# Altium PCB Faceball_2000_buffered_adapter_v1.0.PcbDoc
Units mm, origin at the board's own origin, x right, y up, seen from the top; angles counter-clockwise.
Board outline 80 x 40 mm, 2 copper layers (Top Layer, Bottom Layer), stack 1.58 mm thick; 17 components, 18 nets, 76 pads, 12 vias.
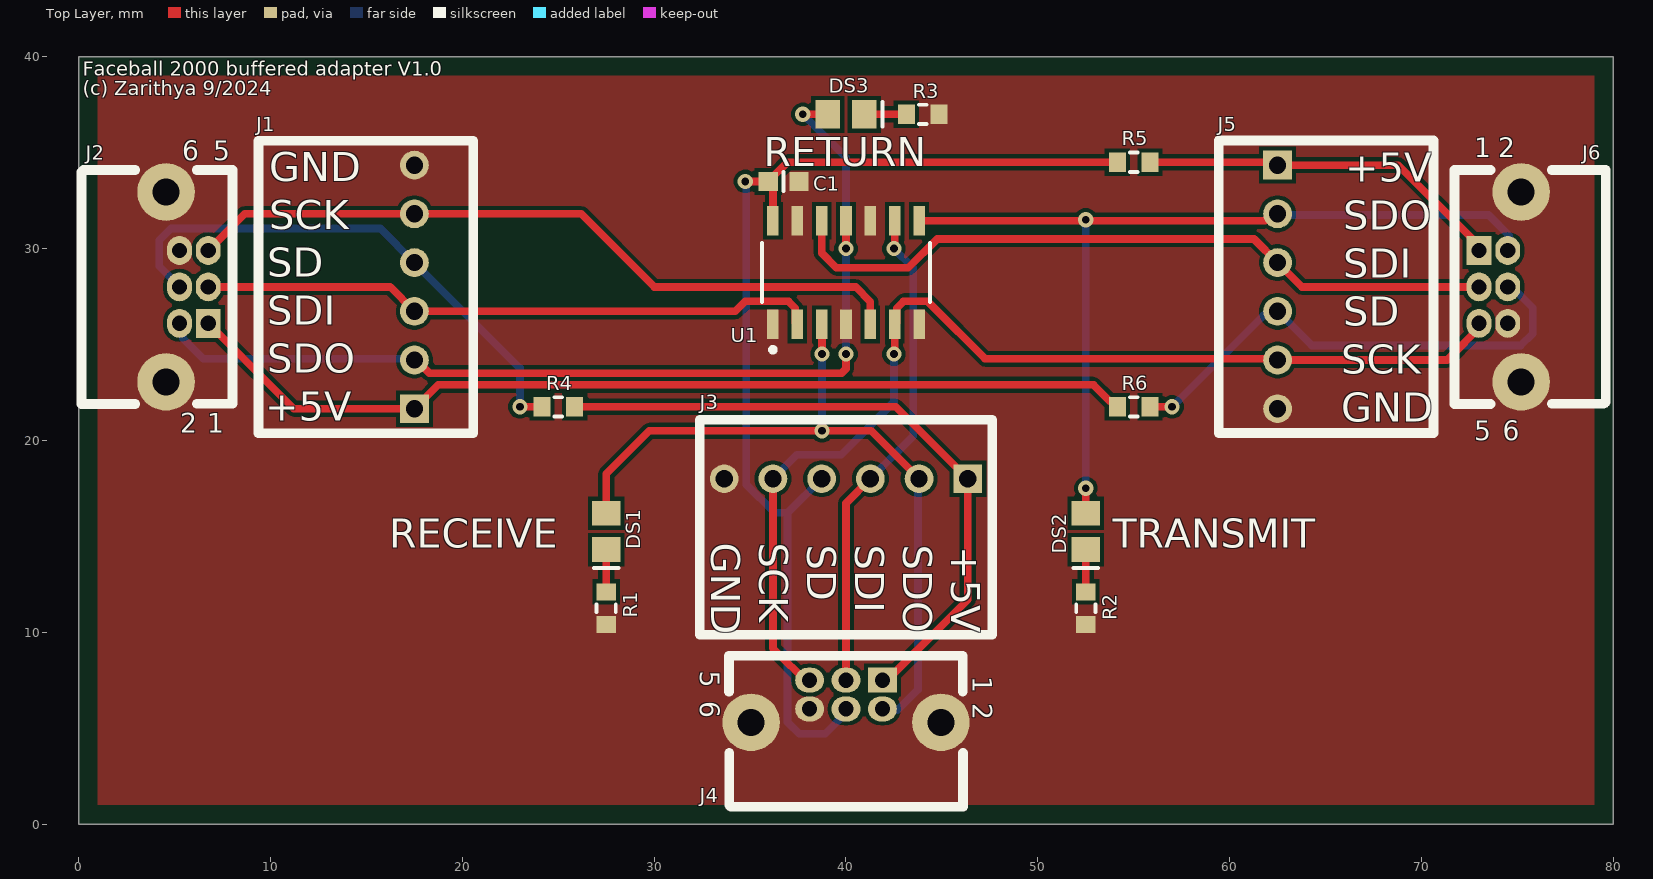
[diagram p0: Top Layer view]
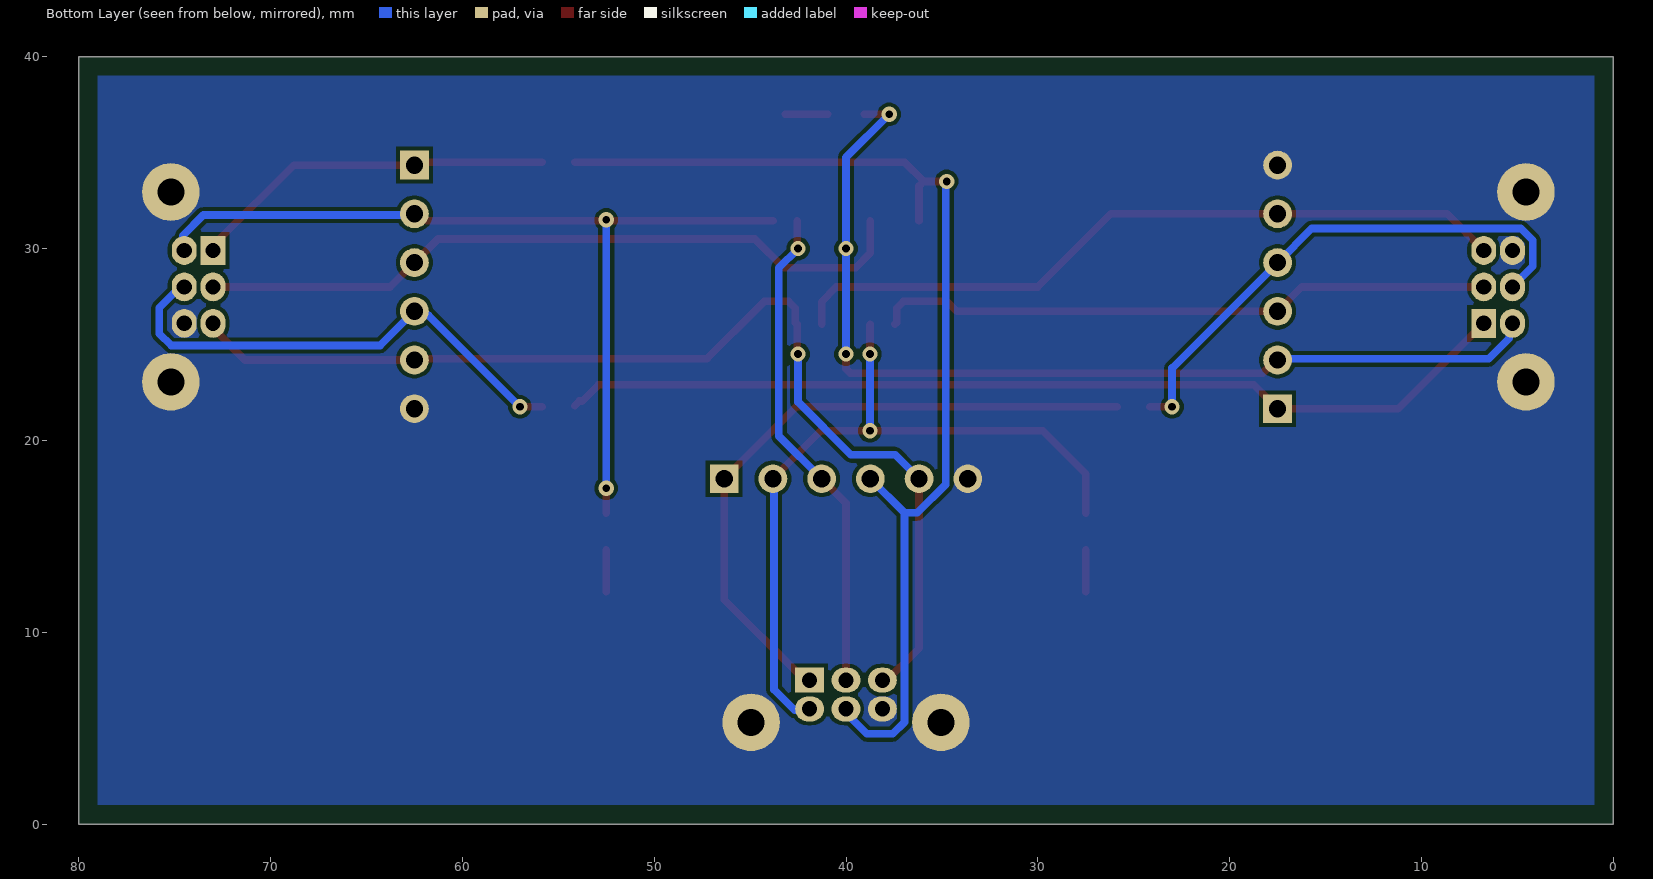
[diagram p1: Bottom Layer view, seen from below]

## Layer stack, top to bottom
Top Solder: solder mask 0.0102, Solder Resist, Dk 3.5
Top Layer: signal copper 0.0356
Dielectric 1: dielectric 1.5086, FR-4, Dk 4.8
Bottom Layer: signal copper 0.0356
Bottom Solder: solder mask 0.0102, Solder Resist, Dk 3.5

## Board outline
0,0 0,40 80,40 80,0

## Design rules (kind name [scope] priority, off if disabled: settings)
AssemblyTestpoint [All] p1: testpointundercomponent=TRUE minsize=1 maxsize=2.5 preferedsize=1.5 minholesize=0 maxholesize=1 preferedholesize=0.8 testpointgrid=0.025 usegrid=TRUE gridtolerance=0 allowsidetop=TRUE allowsidebottom=TRUE
Clearance "Keepout - Outline Clearance" [OnLayer('Keep-Out Layer') vs OnLayer('Mechanical 4')] p1: gap=0 ignorepadtopadclearanceinfootprint=FALSE
Clearance "Area keepout" [(OnLayer('Keep-Out Layer')) vs Not (OnLayer('Keep-Out Layer'))] p2: gap=0.2 ignorepadtopadclearanceinfootprint=FALSE except(0: Arc-Hole Track-Hole SMDPad-Hole THPad-Hole Via-Hole Fill-Hole Poly-Hole Region-Hole Text-Hole)
Clearance "Via Clearance" [(IsVia) vs (IsVia)] p3: gap=0.2 ignorepadtopadclearanceinfootprint=FALSE except(0: Arc-Hole Track-Hole SMDPad-Hole THPad-Hole Via-Hole Fill-Hole Poly-Hole Region-Hole Text-Hole) // Added by Alex Bahr
Clearance "Plane Clearance" [((OnLayer('GND layer'))  Or (OnLayer('Power layer')))] p4: gap=0.2 ignorepadtopadclearanceinfootprint=FALSE except(0: Arc-Hole Track-Hole SMDPad-Hole THPad-Hole Via-Hole Fill-Hole Poly-Hole Region-Hole Text-Hole) // added by Alex Bahr
Clearance "Pad Clearance" [(IsPad) vs (IsPad)] p5: gap=0.2 ignorepadtopadclearanceinfootprint=FALSE except(0: Arc-Hole Track-Hole SMDPad-Hole THPad-Hole Via-Hole Fill-Hole Poly-Hole Region-Hole Text-Hole)
Clearance [All] p6: gap=0.2 ignorepadtopadclearanceinfootprint=FALSE except(0: Arc-Hole Track-Hole SMDPad-Hole THPad-Hole Via-Hole Fill-Hole Poly-Hole Region-Hole Text-Hole)
ComponentClearance [All] p1: gap=0.25 collisioncheckmode=3 verticalgap=0.254 showdistances=FALSE
Height [All] p1: minheight=0 maxheight=100 prefheight=10
HoleSize [All] p1: absolutevalues=TRUE maxlimit=20 minlimit=0.3 maxpercent=80.000 minpercent=20.000
HoleSize Testpoint [All] p2: absolutevalues=TRUE maxlimit=2.5 minlimit=0.025 maxpercent=80.000 minpercent=20.000
HoleSize TestPointUsage [All] p3: absolutevalues=TRUE maxlimit=2.5 minlimit=0.025 maxpercent=80.000 minpercent=20.000
HoleToHoleClearance [All] p1: gap=0.2 allowstackedmicrovias=TRUE
MinimumAnnularRing "Annular ring" [All] p1: minimumring=0.18 // added by Alex Bahr
MinimumSolderMaskSliver [All] p1 off: minsoldermaskwidth=0.254
MinimumSolderMaskSliver SilkscreenOverComponentPads [All] p2 off: minsoldermaskwidth=0.254
PlaneClearance [All] p1: clearance=0.203
PlaneConnect [All] p1: planeconnectstyle=Direct reliefexpansion=0.508 reliefentries=4 reliefconductorwidth=0.254 reliefairgap=0.254
PolygonConnect [All] p1: connectstyle=Direct reliefconductorwidth=0.254 reliefentries=4 polygonreliefangle="90 Angle" airgapwidth=0.254
RoutingVias [All] p1: holewidth=0.4 width=0.8 viastyle="Through Hole" minholewidth=0.3 minwidth=0.7 maxholewidth=1 maxwidth=2
SilkToSilkClearance [All] p1 off: silktosilkclearance=0.254
SilkToSolderMaskClearance [IsPad] p1: minsilkscreentomaskgap=0.01 clearancetoexposedcopper=TRUE
SolderMaskExpansion [All] p1 off: expansion=0.102 istentingtop=FALSE
Width [All] p1: maxlimit=10 minlimit=0.2 preferedwidth=0.2 minimp=50.000000 maximp=50.000000 favimp=50.000000
20 further rules are at their usual default settings.

## Components (designator, comment, footprint, x,y, rotation, side; value= is the part's Value field where it differs from the comment)
C1 "Cap Unpol" CAPC1608N-0603 36.75,33.5 r180 top value=100nF
DS1 "LED" CD2012-0805 27.5,15.25 r270 top
DS2 "LED" CD2012-0805 52.5,15.25 r270 top
DS3 "LED" CD2012-0805 40,37 r0 top
J1 "Gameboy Gamelink screw-in connector" "Gameboy generic Gamelink connector" 17.5,28 r180 top
J2 "Gameboy Gamelink connector w/ shield" "Gameboy Advance Gamelink connector 2" 5.25,28 r90 top
J3 "Gameboy Gamelink screw-in connector" "Gameboy generic Gamelink connector" 40,18 r270 top
J4 "Gameboy Gamelink connector w/ shield" "Gameboy Advance Gamelink connector 2" 40,6 r180 top
J5 "Gameboy Gamelink screw-in connector" "Gameboy generic Gamelink connector" 62.5,28 r0 top
J6 "Gameboy Gamelink connector w/ shield" "Gameboy Advance Gamelink connector 2" 74.5,28 r270 top
R1 "Resistor" RESC1608N-0603 27.5,11.25 r270 top value=1k
R2 "Resistor" RESC1608N-0603 52.5,11.25 r270 top value=1k
R3 "Resistor" RESC1608N-0603 44,37 r0 top value=1k
R4 "Resistor" RESC1608N-0603 25,21.75 r0 top value=0
R5 "Resistor" RESC1608N-0603 55,34.5 r0 top value=0
R6 "Resistor" RESC1608N-0603 55,21.75 r180 top value=0
U1 "SN74LS540" FP-D0014A-MFG 40,28.75 r90 top

## Footprints (in the part's own frame and the unit in brackets; to place one, negate y for a bottom-side part, rotate by r counter-clockwise, add the part's x,y. Pads: shape width x height; smd on the part's side, far side on the other; paste and mask are expansions set on the pad)
CAPC1608N-0603 [mm] "Chip Capacitor, Body 1.6x0.8mm, IPC Medium Density"
  rect 1x1 smd: 1(-0.8,0) 2(0.8,0)
  silkscreen extent 0,-0.5 0,0.5, body extent -0.87,-0.48 0.87,0.48, height 0.85
CD2012-0805 [mm] "Chip Diode; Body 2.0 x 1.3 mm (LxW typ)"
  rect 1.3x1.5 smd: 1(-0.95,0) 2(0.95,0)
  silkscreen extent 1.9,-0.65 1.9,0.65, body extent -1.07,-0.7 1.07,0.7, height 0.65
FP-D0014A-MFG [mm]
  rect 1.55x0.6 smd paste-1000 mask+0: 1(-2.7,3.81) 2(-2.7,2.54) 3(-2.7,1.27) 4(-2.7,0) 5(-2.7,-1.27) 6(-2.7,-2.54) 7(-2.7,-3.81) 8(2.7,-3.81) 9(2.7,-2.54) 10(2.7,-1.27) 11(2.7,0) 12(2.7,1.27) 13(2.7,2.54) 14(2.7,3.81)
  silkscreen extent -4.15,-4.38 1.55,4.38, body extent -3.57,-4.62 3.57,4.62, height 0.25
"Gameboy Advance Gamelink connector 2" [mm] "connector for Gameboy Advance Gamelink cables"
  rect 1.5x1.3 hole 0.8: 1(-1.9,-1.5)
  oval 1.5x1.3 hole 0.8: 2(-1.9,0) 3(0,-1.5) 4(0,0) 5(1.9,-1.5) 6(1.9,0)
  round 3 hole 1.4: 7(-4.95,0.7) 7(4.95,0.7)
  silkscreen extent -6.1,-2.77 6.1,5.1, body extent -5.7,-2.5 5.7,4.8, height 8.89
"Gameboy generic Gamelink connector" [mm] "terminal for Gamelink cable"
  rect 1.5x1.5 hole 0.9: 1(0,6.35)
  round 1.5 hole 0.9: 2(0,3.81) 3(0,1.27) 4(0,-1.27) 5(0,-3.81) 6(0,-6.35)
  silkscreen extent -3.07,-7.62 8.13,7.63, body extent -3.07,-7.82 3.13,7.88, height 8.5
RESC1608N-0603 [mm] "Chip Resistor, Body 1.6x0.8mm, IPC Medium Density"
  rect 0.9x1 smd: 1(-0.85,0) 2(0.85,0)
  silkscreen extent -0.2,-0.5 0.2,0.5, body extent -0.85,-0.48 0.85,0.48, height 0.6

## Part data
C1: "Capacitor", Manufacturer="Generic Components", Class I=Passive, Class II=Capacitor, Published=8-Jun-2000, Publisher="Altium Limited", Revision="July-2002: Re-released for DXP Platform."
DS1: library part "LED red", "Typical LED red", Color=green, Manufacturer="Generic Components", Class I=Optoelectronic, Class II=LED, Published=8-Jun-2000, Publisher="Altium Limited", Purpose=RX, Revision="July-2002: Re-released for DXP Platform."
DS2 DS3: library part "LED red", "Typical LED red", Color=red, Manufacturer="Generic Components", Class I=Optoelectronic, Class II=LED, Published=8-Jun-2000, Publisher="Altium Limited", Revision="July-2002: Re-released for DXP Platform."
  DS2: Purpose=TX
  DS3: Purpose=RETURN
J1 J2 J3 J4 J5 J6: "Gameboy Gamelink connector"
U1: library part SN74HC125DR, "IC BUFFER NON-INVERT 6V 14SOIC", Manufacturer="Texas Instruments", Manufacturer Part Number=SN74LS540N, Supplier Part Number 1=595-SN74LS540N, Category="Buffers, Drivers and Transceivers", ComponentLink1Description=https://datasheet.ciiva.com/14133/mr645748-e-14133733.pdf?src-supplier=Distrelec, ComponentLink1URL=https://datasheet.ciiva.com/14133/mr645748-e-14133733.pdf?src-supplier=Distrelec, ComponentLink2Description=https://datasheet.ciiva.com/41456/001016983-da-01-en-ic-inv-8in-sn74ls-sn74ls540n-pdip-20-tid-41456327.pdf?src-supplier=Conrad, ComponentLink2URL=https://datasheet.ciiva.com/41456/001016983-da-01-en-ic-inv-8in-sn74ls-sn74ls540n-pdip-20-tid-41456327.pdf?src-supplier=Conrad, ComponentLink3Description=https://datasheet.ciiva.com/1869/sn74ls540-1869866.pdf?src-supplier=Digikey, ComponentLink3URL=https://datasheet.ciiva.com/1869/sn74ls540-1869866.pdf?src-supplier=Digikey, Pricing 1="1=2.21, 10=1.59, 50=1.59, 100=1.14, 1000=1.01, 10000=0.855 (USD)", RoHS=Yes, Stock 1=1472, Supplier 1=Mouser
R1 R2 R3 R4 R5 R6: LatestRevisionDate=17-Jul-2002, LatestRevisionNote="Re-released for DXP Platform.", Published=8-Jun-2000, Publisher="Altium Limited"

## Via types
v1: diameter 0.8, hole 0.4, Top Layer to Bottom Layer, tented both sides, 12 vias

## Nets (pads, with @x,y where several pads share a name; then routed paths per layer and width w, separated by ;. In a path a pad name is that pad's centre, name@x,y a point inside that pad or via, vN(x,y) a via of type N, cw(c..) or ccw(c..) an arc to the next point about the centre after c; other vN are vias at no path point)
GND: C1.1 J1.6 J2.6 J2.7 J3.6 J4.6 J4.7 J5.6 J6.6 J6.7 R1.2 R2.2 R3.2 U1.1 U1.4 U1.7 U1.10 U1.13
NetDS1_1: DS1.1 J3.2 J4.2 U1.3 | length 38.4
  Top Layer w0.4: DS1.1 27.5,18.25 29.75,20.5 v1(38.75,20.5) 41.31,20.5 J3.2 ; U1.3 38.75,26.03 v1(38.75,24.5)
  Bottom Layer w0.4: v1(38.75,20.5) v1(38.75,24.5) ; 42.672,5.922 43.75,7 J3.2@43.75,17.94
NetDS1_2: DS1.2 R1.1 | length 2.2
  Top Layer w0.4: R1.1 DS1.2
NetDS2_1: DS2.1 J5.2 J6.2 U1.8 | length 46.6
  Top Layer w0.4: U1.8 61.842,31.45 62.202,31.81 J5.2 ; DS2.1 v1(52.5,17.5)
  Bottom Layer w0.4: v1(52.5,17.5) v1(52.5,31.5) ; J5.2@62.56,31.75 73.5,31.75 74.578,30.672
NetDS2_2: DS2.2 R2.1 | length 2.2
  Top Layer w0.4: R2.1 DS2.2
NetDS3_1: DS3.1 J1.2 J2.2 U1.11 | length 53.3
  Top Layer w0.4: J1.2 17.5,24.25 17.534,24.25 18.284,23.5 39.766,23.5 40,23.734 v1(40,24.5) ; v1(37.75,37) DS3.1 ; v1(40,30) U1.11
  Bottom Layer w0.4: J2.2 5.422,25.928 5.422,25.328 6.5,24.25 17.44,24.25 J1.2 ; v1(37.75,37) 40,34.75 v1(40,30) v1(40,24.5)
NetDS3_2: DS3.2 R3.1 | length 2.2
  Top Layer w0.4: DS3.2 R3.1
NetJ1_1: J1.1 J2.1 R6.2 | length 50.3
  Top Layer w0.4: J2.1 6.75,26 7.2,25.55 7.3,25.55 11.2,21.65 J1.1 18.75,22.9 52.9,22.9 53.75,22.05 53.9,22.05 R6.2@54.15,21.8
NetJ1_3: J1.3 J2.3 U1.2 | length 32.4
  Top Layer w0.4: J2.3 16.23,28 J1.3 34.23,26.73 34.75,27.25 37,27.25 37.36,26.89 37.36,26.15 U1.2
NetJ1_4: J1.4 J2.4 R4.1 | length 28.1
  Top Layer w0.4: v1(23,21.75) R4.1
  Bottom Layer w0.4: J2.4 5.25,28.034 4.2,29.084 4.2,30.435 4.815,31.05 15.72,31.05 J1.4 23,23.77 v1(23,21.75)
NetJ1_5: J1.5 J2.5 U1.5 | length 38.4
  Top Layer w0.4: J2.5 8.66,31.81 J1.5 26.19,31.81 30,28 40.5,28 41.27,27.23 U1.5
NetJ3_1: J3.1 J4.1 R4.2 | length 33.9
  Top Layer w0.4: R4.2 42.6,21.75 J3.1 46.35,11.7 J4.1@42.45,7.8
NetJ3_3: J3.3 J4.3 U1.9 | length 26.1
  Top Layer w0.4: J4.3@40,7.25 40,16.73 J3.3 ; v1(42.5,30) 42.54,30.04 U1.9
  Bottom Layer w0.4: J3.3 43.5,20.23 43.5,29 v1(42.5,30)
NetJ3_5: J3.5 J4.5 J5.5 J6.5 U1.6 | length 57.3
  Top Layer w0.4: J3.5 36.19,9.16 J4.5@38.1,7.25 ; v1(42.5,24.5) 42.54,24.54 U1.6 42.64,26.15 42.64,26.89 43,27.25 44.251,27.25 44.51,26.991 47.25,24.25 62.44,24.25 J5.5 71.34,24.19 J6.5@73.25,26.1
  Bottom Layer w0.4: J3.5 37.44,19.25 39.75,19.25 42.5,22 v1(42.5,24.5)
NetJ5_1: J5.1 J6.1 R5.2 | length 18.5
  Top Layer w0.4: R5.2 62.35,34.5 J5.1 68.8,34.35 J6.1@72.7,30.45
NetJ5_3: J5.3 J6.3 U1.12 | length 38.2
  Top Layer w0.4: U1.12 38.73,29.77 39.5,29 43.25,29 44.75,30.5 61.27,30.5 J5.3 63.77,28 J6.3@73.25,28
NetJ5_4: J5.4 J6.4 R6.1 | length 25.9
  Top Layer w0.4: R6.1 v1(57,21.75) ; J5.4@62.48,26.75 J5.4
  Bottom Layer w0.4: v1(57,21.75) 61.77,26.52 62.29,26.52 J5.4 64.28,24.95 75.185,24.95 75.8,25.565 75.8,26.916 J6.4@74.75,27.966
Vcc: C1.2 J3.4 J4.4 R5.1 U1.14 | length 57.7
  Top Layer w0.4: v1(34.75,33.5) C1.2 ; U1.14 36.19,33.26 C1.2 ; R5.1 36.95,34.5 C1.2
  Bottom Layer w0.4: v1(34.75,33.5) 34.8,33.45 34.8,17.7 36.28,16.22 36.95,16.22 ; J3.4 36.95,16.22 ; J4.4@39.966,5.75 38.916,4.7 37.565,4.7 36.95,5.315 36.95,16.22

## Polygon pours and split planes (outlines as drawn)
GND on Bottom Layer "Bottom Layer-No Net" (solid, remove dead copper, pour order 1): 1,39 1,1 79,1 79,39
GND on Top Layer "Bottom Layer-No Net" (solid, remove dead copper, pour order 0): 1,39 1,1 79,1 79,39

## Silkscreen, mask and mechanical layers (free items; w line width, h text height)
Top Overlay:
  text "Faceball 2000 buffered adapter V1.0" at 0.2,39 h0.75
  text "(c) Zarithya 9/2024" at 0.2,38 h0.75
  text "RETURN" at 35.7,34.3 h1.5
  text "RECEIVE" at 16.2,14.4 h1.5
  text "TRANSMIT" at 53.9,14.4 h1.5
Mechanical 4:
  the board outline again, w0.2

## Text inside footprints (layer, text, board x,y; h text height)
J1: Top Overlay "SCK" at 9.92,31.02 h1.52; Top Overlay "SD" at 9.82,28.52 h1.52; Top Overlay "SDI" at 9.82,26.02 h1.52; Top Overlay "SDO" at 9.82,23.52 h1.52; Top Overlay "+5V" at 9.72,21.02 h1.52; Top Overlay "GND" at 9.92,33.52 h1.52
J2: Top Overlay "5" at 7,34.6 h1; Top Overlay "1" at 6.7,20.4 h1; Top Overlay "6" at 5.4,34.6 h1; Top Overlay "2" at 5.3,20.4 h1
J3: Top Overlay "SCK" at 35.48,14.67 h1.52 r270; Top Overlay "SD" at 37.98,14.57 h1.52 r270; Top Overlay "SDI" at 40.48,14.57 h1.52 r270; Top Overlay "SDO" at 42.98,14.57 h1.52 r270; Top Overlay "+5V" at 45.48,14.47 h1.52 r270; Top Overlay "GND" at 32.98,14.67 h1.52 r270
J4: Top Overlay "5" at 32.4,8 h1 r270; Top Overlay "1" at 46.6,7.7 h1 r270; Top Overlay "6" at 32.4,6.4 h1 r270; Top Overlay "2" at 46.6,6.3 h1 r270
J5: Top Overlay "SCK" at 65.83,23.48 h1.52; Top Overlay "SD" at 65.93,25.98 h1.52; Top Overlay "SDI" at 65.93,28.48 h1.52; Top Overlay "SDO" at 65.93,30.98 h1.52; Top Overlay "+5V" at 66.03,33.48 h1.52; Top Overlay "GND" at 65.83,20.98 h1.52
J6: Top Overlay "5" at 72.75,20 h1; Top Overlay "1" at 72.75,34.75 h1; Top Overlay "6" at 74.25,20 h1; Top Overlay "2" at 74,34.75 h1